# Altium PCB PocketBeagle.PcbDoc (part 2 of 2)
Units mm, origin at the board's own origin, x right, y up, seen from the top; angles counter-clockwise.
Board outline 55 x 35 mm, 4 copper layers (Top, VDD, DigitalGND, Bottom), stack 2.11 mm thick; 63 components, 132 nets, 486 pads, 168 vias.
Unrouted connection lines stored in the file: 3.
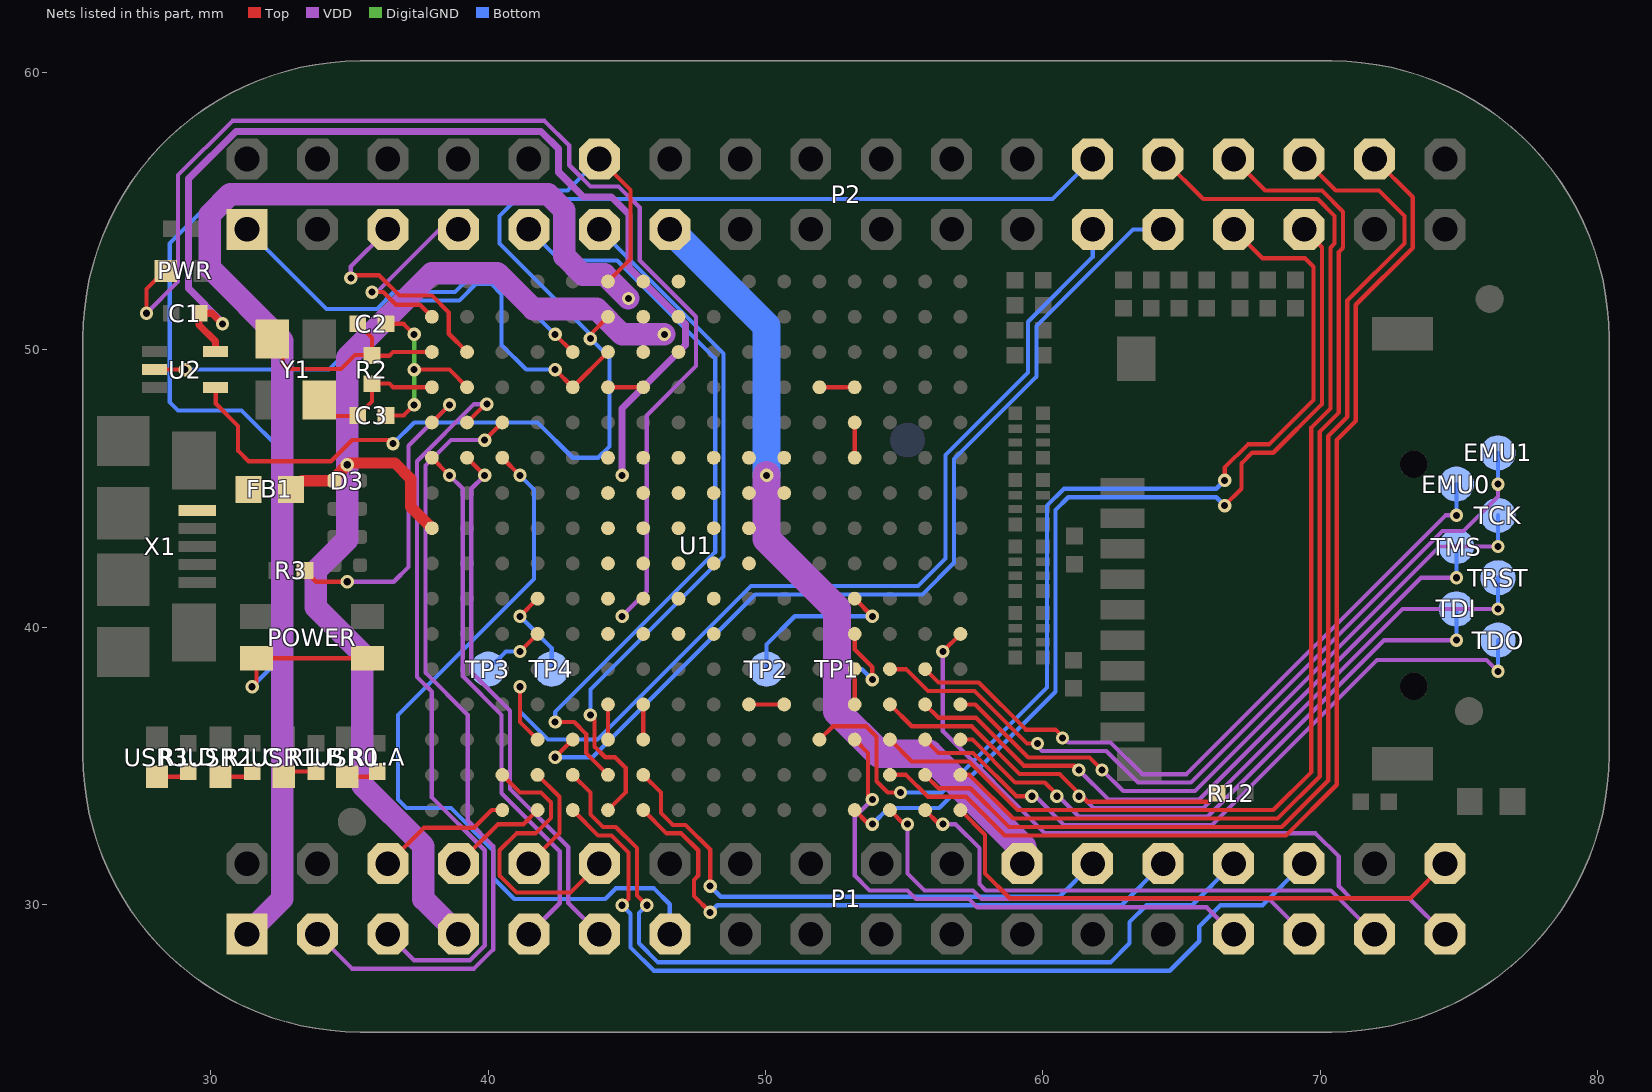
[diagram p4: the nets of this part, all layers, seen from the top]

## Via types
v1: diameter 0.48, hole 0.254, Top to Bottom, tented both sides, 168 vias

## Nets (pads, with @x,y where several pads share a name; then routed paths per layer and width w, separated by ;. In a path a pad name is that pad's centre, name@x,y a point inside that pad or via, vN(x,y) a via of type N, cw(c..) or ccw(c..) an arc to the next point about the centre after c; other vN are vias at no path point) (continued)
I2C1.SCL: P2.9 U1.B11 | length 27.2
  Top w0.152: v1(42.418,36.576) 43.104,36.576 43.536,36.144 43.536,35.458 U1.B11@44.323,34.671
  Bottom w0.152: P2.9@41.47,54.33 42.587,53.213 44.653,53.213 48.184,49.682 48.184,42.697 42.418,36.932 v1(42.418,36.576)
I2C1.SDA: P2.11 U1.A11 | length 25.8
  Top w0.152: v1(43.688,36.83) 43.84,36.678 43.84,35.687 44.221,35.306 44.577,35.306 44.958,34.925 44.958,34.036 U1.A11@44.323,33.401
  Bottom w0.152: v1(43.688,36.83) 43.688,37.744 48.489,42.545 48.489,49.851 P2.11@44.01,54.33
I2C2.SCL: P1.28 U1.A10 | length 22.2
  Top w0.152: U1.A10@45.593,33.401 46.431,32.563 46.965,32.563 47.574,31.953 47.574,31.039 47.422,30.886 47.422,30.302 v1(48.006,29.718)
  Bottom w0.152: v1(48.006,29.718) 48.26,29.972 62.832,29.972 P1.28@64.33,31.47
I2C2.SDA: P1.26 U1.B10 | length 19.7
  Top w0.152: U1.B10@45.593,34.671 46.228,34.036 46.228,33.299 46.66,32.868 47.117,32.868 48.006,31.979 v1(48.006,30.658)
  Bottom w0.152: v1(48.006,30.658) 48.387,30.277 60.597,30.277 P1.26@61.79,31.47
JTAG_EMU0: EMU0.TP U1.E2 | length 25.7
  Top w0.152: U1.E2@55.753,38.481 56.236,37.998 57.683,37.998 59.382,36.3 60.449,36.3 60.7,36.049 v1(60.7,36)
  VDD w0.152: v1(60.7,36) 60.749,36 60.909,35.839 62.433,35.839 63.576,34.696 65.176,34.696 74.505,44.025 v1(74.9,44.025)
  Bottom w0.152: v1(74.9,44.025) EMU0.TP@74.9,45.15
JTAG_EMU1: EMU1.TP U1.E3 | length 29.5
  Top w0.152: U1.E3@54.483,38.481 55.067,38.481 55.855,37.694 57.531,37.694 59.425,35.8 v1(59.8,35.8)
  VDD w0.152: v1(59.8,35.8) 59.8,35.7 59.965,35.535 62.281,35.535 63.424,34.392 65.329,34.392 74.397,43.459 75.159,43.459 76.4,44.701 v1(76.4,45.15)
  Bottom w0.152: v1(76.4,45.15) EMU1.TP@76.4,46.275
JTAG_TCK: TCK.TP U1.D1 | length 25.4
  Top w0.152: U1.D1@57.023,37.211 57.556,37.211 59.467,35.3 61.677,35.3 v1(62.128,34.849)
  VDD w0.152: v1(62.128,34.849) 62.89,34.087 65.481,34.087 74.294,42.9 v1(76.4,42.9)
  Bottom w0.152: v1(76.4,42.9) TCK.TP@76.4,44.025
JTAG_TDI: TDI.TP U1.C1 | length 22.8
  Top w0.152: U1.C1@57.023,35.941 57.455,35.941 58.996,34.4 60.063,34.4 60.5,33.963 v1(60.5,33.9)
  VDD w0.152: v1(60.5,33.9) 60.563,33.9 61.29,33.172 65.938,33.172 72.291,39.525 v1(74.9,39.525)
  Bottom w0.152: v1(74.9,39.525) TDI.TP@74.9,40.65
JTAG_TDO: TDO.TP U1.C2 | length 25.7
  Top w0.152: U1.C2@55.753,35.941 56.236,35.458 57.48,35.458 59.039,33.9 v1(59.6,33.9)
  VDD w0.152: v1(59.6,33.9) 59.724,33.9 60.757,32.868 66.091,32.868 72.034,38.811 75.989,38.811 v1(76.4,38.4)
  Bottom w0.152: v1(76.4,38.4) TDO.TP@76.4,39.525
JTAG_TMS: TMS.TP U1.D2 | length 25
  Top w0.152: U1.D2@55.753,37.211 56.236,36.728 57.582,36.728 59.31,35 61.139,35 v1(61.29,34.849)
  VDD w0.152: v1(61.29,34.849) 62.357,33.782 65.634,33.782 73.627,41.775 v1(74.9,41.775)
  Bottom w0.152: v1(74.9,41.775) TMS.TP@74.9,42.9
JTAG_TRST#: R12.2 TRST.TP U1.D3 | length 32.8
  Top w0.152: U1.D3@54.483,37.211 55.27,36.424 57.429,36.424 59.153,34.7 60.601,34.7 61.3,34.001 v1(61.3,33.9) 61.401,33.9 61.595,33.706 65.972,33.706 R12.2@66.277,34.011
  VDD w0.152: v1(61.3,33.9) 61.401,33.9 61.824,33.477 65.786,33.477 72.959,40.65 v1(76.4,40.65)
  Bottom w0.152: v1(76.4,40.65) TRST.TP@76.4,41.775
NetR1.A_1: R1.A.1 USR0.1 | length 1.2
  Top w0.152: USR0.1@34.925,34.606 36.006,34.606 R1.A.1@36.1,34.7
NetR1.B_1: R1.B.1 USR1.1 | length 1.1
  Top w0.152: USR1.1@32.7,34.7 32.792,34.792 R1.B.1@33.8,34.792
NetR1.C_1: R1.C.1 USR2.1 | length 1.1
  Top w0.152: USR2.1@30.353,34.606 31.306,34.606 R1.C.1@31.4,34.7
NetR1.D_1: R1.D.1 USR3.1 | length 1.1
  Top w0.152: USR3.1@28.067,34.606 28.906,34.606 R1.D.1@29.1,34.8
NetR3_2: R3.2 U1.M16 | length 11.5
  Top w0.152: R3.2@33.393,42.037 33.8,41.631 v1(34.925,41.631) ; U1.M16@37.973,47.371 v1(38.608,48.006)
  VDD w0.152: v1(34.925,41.631) 36.601,41.631 37.135,42.164 37.135,46.533 v1(38.608,48.006)
NetTP1_TP: TP1.TP U1.F4 | length 3.3
  Top w0.152: U1.F4@53.213,39.751 53.213,39.192 53.848,38.557 v1(53.848,38.1)
  Bottom w0.152: TP1.TP@52.578,38.481 53.467,38.481 v1(53.848,38.1)
NetTP2_TP: TP2.TP U1.G4 | length 6
  Top w0.152: U1.G4@53.213,41.021 v1(53.848,40.386)
  Bottom w0.152: TP2.TP@50.038,38.481 50.038,39.37 51.054,40.386 v1(53.848,40.386)
NetTP3_TP: TP3.TP U1.F13 | length 2.3
  Top w0.152: v1(41.148,39.116) U1.F13@41.783,39.751
  Bottom w0.152: TP3.TP@40.005,38.481 40.64,39.116 v1(41.148,39.116)
NetTP4_TP: TP4.TP U1.G13 | length 3.3
  Top w0.152: v1(41.148,40.386) U1.G13@41.783,41.021
  Bottom w0.152: v1(41.148,40.386) 42.291,39.243 TP4.TP@42.291,38.481
NetU1_C10: U1.C10 U1.D10 | length 1.3
  Top w0.152: U1.C10@45.593,35.941 U1.D10@45.593,37.211
NetU1_C11: U1.C11 U1.D11 | length 1.3
  Top w0.152: U1.C11@44.323,35.941 U1.D11@44.323,37.211
NetU1_D4: U1.D4 U1.E4 | length 1.3
  Top w0.152: U1.D4@53.213,37.211 U1.E4@53.213,38.481
NetU1_D6: U1.D6 U1.D7 | length 1.3
  Top w0.152: U1.D7@49.403,37.211 U1.D6@50.673,37.211
NetU1_L4: U1.L4 U1.M4 | length 1.3
  Top w0.152: U1.L4@53.213,46.101 U1.M4@53.213,47.371
NetU1_N4: U1.N4 U1.N5 | length 1.3
  Top w0.152: U1.N5@51.943,48.641 U1.N4@53.213,48.641
NetU1_N10: U1.N10 U1.N11 | length 1.3
  Top w0.152: U1.N11@44.323,48.641 U1.N10@45.593,48.641
OSC.GND: C2.1 C3.1 U1.N15 | length 7.1
  Top w0.152: C3.1@36.314,47.625 36.957,47.625 v1(37.338,48.006) ; C2.1@36.314,50.927 36.957,50.927 v1(37.338,50.546) ; v1(37.338,49.276) 38.608,49.276 U1.N15@39.243,48.641
  DigitalGND w0.152: v1(37.338,48.006) v1(37.338,49.276) v1(37.338,50.546)
OSC.IN: C2.2 R2.2 U1.P16 Y1.1 | length 7.7
  Top w0.152: Y1.1@32.6,50 32.6,49.5 32.8,49.3 34.7,49.3 35.2,49.8 35.8,49.8 R2.2@35.814,49.786 ; C2.2@35.31,50.923 35.314,50.927 35.814,50.427 R2.2@35.814,49.786 ; R2.2@35.9,49.7 R2.2@35.824,49.776 ; U1.P16@37.973,49.911 36.576,49.911 36.441,49.776 R2.2@35.824,49.776 ; R2.2@35.814,49.786 R2.2@35.824,49.776 ; R2.2@35.814,49.786 R2.2@35.814,49.784 35.814,49.776 R2.2@35.824,49.776
OSC.OUT: C3.2 R2.1 U1.N16 Y1.3 | length 4.9
  Top w0.152: Y1.3@34,47.6 35.289,47.6 35.31,47.621 35.314,47.625 35.814,48.125 R2.1@35.814,48.768 35.814,48.776 36.441,48.776 36.576,48.641 U1.N16@37.973,48.641
PMIC_PGOOD: U1.N12 U1.P11 U2.2 | length 20.8
  Top w0.152: U2.2@27.983,49.276 v1(29.083,49.276) ; v1(42.418,49.276) U1.N12@43.053,48.641 U1.P11@44.323,49.911
  Bottom w0.152: v1(29.083,49.276) 34.265,49.276 36.754,51.765 38.964,51.765 39.573,52.375 40.107,52.375 40.488,51.994 40.488,50.165 41.377,49.276 v1(42.418,49.276)
PRU0.1: P1.33 U1.A2 | length 18.8
  Top w0.152: U1.A2@55.753,33.401 56.261,32.893 v1(56.388,32.893)
  VDD w0.152: v1(56.388,32.893) 56.845,32.893 57.709,32.029 57.709,30.734 57.937,30.505 70.375,30.505 P1.33@71.95,28.93
PRU0.2: P2.32 U1.B2 | length 42
  Top w0.152: U1.B2@55.753,34.671 56.236,34.188 57.379,34.188 58.776,32.791 68.605,32.791 70.282,34.468 70.282,46.888 70.968,47.574 70.968,51.765 73.025,53.823 73.025,54.813 72.111,55.728 70.552,55.728 P2.32@69.41,56.87
PRU0.3: P2.30 U1.B1 | length 39.7
  Top w0.152: U1.B1@57.023,34.671 57.353,34.671 58.928,33.096 68.453,33.096 69.977,34.62 69.977,47.041 70.663,47.727 70.663,53.518 70.815,53.67 70.815,54.966 70.053,55.728 68.012,55.728 P2.30@66.87,56.87
PRU0.4: P1.31 U1.A3 | length 17.8
  Top w0.152: U1.A3@54.483,33.401 54.991,32.893 v1(55.118,32.893)
  VDD w0.152: v1(55.118,32.893) 55.118,31.115 55.728,30.505 57.48,30.505 57.785,30.201 68.139,30.201 P1.31@69.41,28.93
PRU0.5: P2.34 U1.B3 | length 42
  Top w0.152: U1.B3@54.483,34.671 55.067,34.671 55.855,33.884 57.226,33.884 58.623,32.487 68.758,32.487 70.587,34.315 70.587,46.736 71.272,47.422 71.272,51.613 73.33,53.67 73.33,55.49 P2.34@71.95,56.87
PRU0.6: P2.28 U1.C3 | length 44.2
  Top w0.152: U1.C3@54.483,35.941 55.27,35.154 57.328,35.154 59.08,33.401 68.301,33.401 69.672,34.773 69.672,47.193 70.358,47.879 70.358,53.67 70.51,53.823 70.51,54.813 69.901,55.423 65.777,55.423 P2.28@64.33,56.87
PRU0.7: P1.29 U1.C4 | length 20
  Top w0.152: U1.C4@53.213,35.941 53.696,35.458 53.696,33.934 v1(53.848,33.782)
  VDD w0.152: v1(53.848,33.782) 53.213,33.147 53.213,31.039 53.746,30.505 55.118,30.505 55.423,30.201 57.328,30.201 57.633,29.896 65.904,29.896 P1.29@66.87,28.93
PRU1.10: P1.35 U1.F1 | length 25.5
  Top w0.152: v1(56.388,39.116) U1.F1@57.023,39.751
  VDD w0.152: v1(56.388,39.116) 56.388,36.246 60.071,32.563 69.825,32.563 70.663,31.725 70.663,30.658 71.12,30.201 73.219,30.201 P1.35@74.49,28.93
PWM0A: P1.36 U1.A1 | length 20.1
  Top w0.152: U1.A1@57.023,33.401 57.912,32.512 57.912,31.115 58.801,30.226 73.246,30.226 P1.36@74.49,31.47
PWM1A: P2.1 U1.P12 | length 14.6
  Top w0.152: v1(42.418,50.546) U1.P12@43.053,49.911
  Bottom w0.152: P2.1@31.31,54.33 34.18,51.46 35.992,51.46 36.601,52.07 38.811,52.07 39.421,52.68 40.284,52.68 v1(42.418,50.546)
PWR.BTN: P2.12 POWER.3 POWER.4 U1.T11 | length 46.6
  Top w0.152: v1(31.496,37.846) 31.655,38.005 POWER.3@31.655,38.874 POWER.4@35.655,38.874 ; P2.12@44.01,56.87 45.136,55.744 45.136,53.264 U1.T11@44.323,52.451
  Bottom w0.152: v1(31.496,37.846) 32.639,38.989 32.639,46.279 31.115,47.803 28.829,47.803 28.524,48.108 28.524,53.823 30.429,55.728 42.868,55.728 P2.12@44.01,56.87
RESET#: P2.26 U1.R11 U2.4 | length 50.8
  Top w0.152: U2.4@30.183,48.626 30.183,48.049 30.988,47.244 30.988,46.355 31.369,45.974 34.341,45.974 35.103,46.736 36.449,46.736 v1(36.576,46.609) ; v1(43.688,50.394) 43.688,50.546 U1.R11@44.323,51.181
  Bottom w0.152: v1(36.576,46.609) 37.338,47.371 41.783,47.371 43.053,46.101 43.967,46.101 44.374,46.507 44.374,49.708 v1(43.688,50.394) 43.688,50.546 40.411,53.823 40.411,54.813 41.021,55.423 60.343,55.423 P2.26@61.79,56.87
SPI0.CLK: P1.8 U1.A13 | length 3.7
  Top w0.152: P1.8@38.93,31.47 40.353,32.893 41.275,32.893 U1.A13@41.783,33.401
SPI0.CS: P1.6 U1.A14 | length 4.9
  Top w0.152: P1.6@36.39,31.47 37.686,32.766 39.497,32.766 40.132,33.401 U1.A14@40.513,33.401
SPI0.MISO: P1.10 U1.B13 | length 4
  Top w0.152: P1.10@41.47,31.47 42.57,32.57 42.57,33.884 U1.B13@41.783,34.671
SPI0.MOSI: P1.12 U1.B14 | length 10.3
  Top w0.152: U1.B14@40.513,34.671 41.148,34.036 41.91,34.036 42.266,33.68 42.266,33.122 41.707,32.563 41.021,32.563 40.411,31.953 40.411,31.039 41.021,30.429 42.969,30.429 P1.12@44.01,31.47
SPI1.CLK: P2.29 U1.C5 | length 38.1
  Top w0.152: U1.C5@51.943,35.941 52.426,36.424 53.619,36.424 54,36.043 54,34.442 54.407,34.036 v1(54.864,34.036) ; v1(66.548,45.288) 66.548,45.745 67.386,46.584 68.148,46.584 69.748,48.184 69.748,52.984 69.444,53.289 67.911,53.289 P2.29@66.87,54.33
  Bottom w0.152: v1(54.864,34.036) 56.363,34.036 60.147,37.821 60.147,44.374 60.757,44.983 66.243,44.983 v1(66.548,45.288)
SPI1.CS: P2.31 U1.A4 | length 34.5
  Top w0.152: U1.A4@53.213,33.401 53.721,32.893 v1(53.848,32.893) ; v1(66.548,44.374) 67.158,44.983 67.158,45.898 67.539,46.279 68.301,46.279 70.053,48.031 70.053,53.687 P2.31@69.41,54.33
  Bottom w0.152: v1(53.848,32.893) 54.432,33.477 56.261,33.477 60.452,37.668 60.452,44.221 60.909,44.679 66.243,44.679 v1(66.548,44.374)
SPI1.MISO: P2.27 U1.C12 | length 33.9
  Top w0.152: v1(42.418,35.306) U1.C12@43.053,35.941
  Bottom w0.152: v1(42.418,35.306) 43.764,35.306 49.632,41.173 55.651,41.173 56.794,42.316 56.794,46.05 59.766,49.022 59.766,50.851 63.245,54.33 P2.27@64.33,54.33
SPI1.MOSI: P2.25 U1.C13 | length 35.6
  Top w0.152: v1(41.148,37.846) 41.148,36.576 U1.C13@41.783,35.941
  Bottom w0.152: v1(41.148,37.846) 41.148,36.957 42.164,35.941 43.942,35.941 49.479,41.478 55.499,41.478 56.49,42.469 56.49,46.203 59.461,49.174 59.461,51.003 61.79,53.332 P2.25@61.79,54.33
UART0.RX: P1.32 U1.A12 | length 32.8
  Top w0.152: U1.A12@43.053,33.401 43.967,32.487 44.45,32.487 45.06,31.877 45.06,30.201 v1(44.831,29.972)
  Bottom w0.152: v1(44.831,29.972) 45.136,29.667 45.136,28.448 45.974,27.61 64.567,27.61 65.634,28.677 65.634,29.21 66.396,29.972 67.912,29.972 P1.32@69.41,31.47
UART0.TX: P1.30 U1.B12 | length 31.2
  Top w0.152: U1.B12@43.053,34.671 43.688,34.036 43.688,33.249 44.145,32.791 44.602,32.791 45.364,32.029 45.364,30.328 v1(45.72,29.972)
  Bottom w0.152: v1(45.72,29.972) 45.441,29.693 45.441,28.6 46.126,27.915 62.433,27.915 63.119,28.6 63.119,29.362 63.729,29.972 65.372,29.972 P1.30@66.87,31.47
UART4.RX: P2.5 U1.P15 | length 8.1
  Top w0.152: v1(35.052,52.578) 35.154,52.68 36.068,52.68 36.805,51.943 37.973,51.943 38.583,51.333 38.583,50.571 U1.P15@39.243,49.911
  VDD w0.152: v1(35.052,52.578) 35.052,52.992 P2.5@36.39,54.33
UART4.TX: P2.7 U1.R16 | length 6.6
  Top w0.152: v1(35.814,52.07) 36.22,52.07 36.678,51.613 37.541,51.613 U1.R16@37.973,51.181
  VDD w0.152: v1(35.814,52.07) 35.992,52.07 38.252,54.33 P2.7@38.93,54.33
USB1.D+: P1.11 U1.L15 | length 19.5
  Top w0.152: U1.L15@39.243,46.101 v1(39.878,45.466)
  VDD w0.152: v1(39.878,45.466) 39.395,44.983 39.395,38.379 40.792,36.982 40.792,34.163 42.888,32.067 42.888,30.052 P1.11@44.01,28.93
USB1.D-: P1.9 U1.L16 | length 19.5
  Top w0.152: U1.L16@37.973,46.101 v1(38.608,45.466)
  VDD w0.152: v1(38.608,45.466) 39.091,44.983 39.091,38.227 40.488,36.83 40.488,34.011 42.583,31.915 42.583,30.043 P1.9@41.47,28.93
USB1.DRVVBUS: P1.3 U1.M14 | length 29
  Top w0.152: v1(39.878,46.736) U1.M14@40.513,47.371
  VDD w0.152: P1.3@33.85,28.93 35.094,27.686 39.497,27.686 40.183,28.372 40.183,32.106 39.268,33.02 39.268,36.83 37.744,38.354 37.744,45.822 38.659,46.736 v1(39.878,46.736)
USB1.ID: P1.13 U1.L14 | length 28.2
  Top w0.152: U1.L14@40.513,46.101 v1(41.148,45.466)
  Bottom w0.152: v1(41.148,45.466) 41.656,44.958 41.656,41.732 36.754,36.83 36.754,33.782 37.059,33.477 38.659,33.477 40.183,31.953 40.183,30.963 40.945,30.201 44.221,30.201 44.602,30.582 45.974,30.582 46.55,30.006 P1.13@46.55,28.93
USB1.VBUS: P1.5 U1.M15 | length 26.9
  Top w0.152: U1.M15@39.243,47.371 39.903,48.031 v1(39.954,48.031)
  VDD w0.152: P1.5@36.39,28.93 37.329,27.991 39.345,27.991 39.878,28.524 39.878,31.953 37.973,33.858 37.973,37.668 37.44,38.202 37.44,45.974 39.497,48.031 v1(39.954,48.031)
VBUS.RAW: FB1.1 X1.VBUS
VDD_1V8: U1.F10 U1.G10 U1.H10 U1.H11 U1.J10 U1.J11 U1.K10 U1.L10
VDD_3V3A: U1.F8 U1.F9 U1.G8 U1.G9 U1.H7 U1.H8 U1.H9 U1.J7 U1.J8 U1.J9 U1.K8 U1.K9 U1.L8 U1.L9
VDD_3V3AUX: PWR.2 U1.F11 U1.G11 | length 43.1
  Top w0.152: v1(27.686,51.308) 27.686,52.185 PWR.2@28.333,52.832
  VDD w0.152: v1(27.686,51.308) 28.829,52.451 28.829,56.286 30.785,58.242 42.037,58.242 42.926,57.353 42.926,56.642 43.688,55.88 44.704,55.88 45.466,55.118 45.466,53.213 47.498,51.181 47.498,49.403 45.72,47.625 45.72,41.275 v1(44.831,40.386)
VDD_RTC: C1.1 U1.K11 U1.L11 U2.5 | length 38.1
  Top w0.254: U2.5@29.906,49.926 U2.5@30.183,49.926 30.183,50.284 29.583,50.884 29.583,51.308 30.048,51.308 v1(30.429,50.927)
  VDD w0.254: v1(30.429,50.927) 30.429,50.978 29.21,52.197 29.21,56.159 30.912,57.861 41.91,57.861 42.545,57.226 42.545,56.388 43.434,55.499 44.45,55.499 45.085,54.864 45.085,52.959 47.117,50.927 47.117,50.165 44.831,47.879 v1(44.831,45.466)
VIN: P1.1 U1.P10 U1.R10 U1.T10 | length 45.5
  VDD w0.813: P1.1@31.31,28.93 32.588,30.208 32.588,50.317 29.972,52.934 29.972,54.864 30.709,55.601 42.164,55.601 42.748,55.016 42.748,53.365 43.409,52.705 44.196,52.705 v1(45.06,51.841)
VIN.USB: D3.2 FB1.2 P1.7 U1.J16 U1.P9 U1.R9 U1.T9 | length 44
  Top w0.406: FB1.2@32.981,44.958 33.298,45.276 D3.2@34.462,45.276 34.462,45.384 v1(34.925,45.847) 34.989,45.91 36.639,45.91 37.211,45.339 37.211,44.323 U1.J16@37.973,43.561
  VDD w0.813: P1.7@38.93,28.93 37.668,30.192 37.668,32.106 35.458,34.315 35.458,39.04 33.782,40.716 33.782,42.012 34.925,43.155 34.925,44.831 v1(34.925,45.847) 34.925,49.708 37.973,52.756 40.335,52.756 41.631,51.46 43.917,51.46 44.831,50.546 v1(46.355,50.546)
VOUT: P1.24 P2.13 U1.K6 U1.K7 U1.L6 U1.L7 | length 29.2
  VDD w1.016: v1(50.038,45.466) 50.038,43.18 52.578,40.64 52.578,36.957 54.102,35.433 55.88,35.433 59.25,32.063 P1.24@59.25,31.47
  Bottom w1.016: P2.13@46.55,54.33 50.038,50.842 v1(50.038,45.466)
pads on no net: C1.2 FUD1.P$1 FUD2.P$1 FUD3.P$1 PWR.1 R1.2 U1.A5 U1.A6 U1.B5 U1.D5 U1.D12 U1.D13 U1.D14 U1.D15 U1.D16 U1.E13 U1.E14 U1.E15 U1.E16 U1.F14 U1.F15 U1.F16 U1.G14 U1.G15 U1.G16 U1.H6 U1.H14 U1.H15 U1.H16 U1.J6 U1.J14 U1.J15 U1.K4 U1.K13 U1.L13 U1.M1 U1.M13 U1.N1 U1.N2 U1.P1 U1.P2 U1.P3 U1.P4 U1.R1 U1.R2 U1.R3 U1.R4 U1.R12 U1.T1 U1.T2 U1.T3 U1.T4 U1.T12 U1.T13 U2.1 X2.1@73.364,37.866 X2.1@73.364,45.866 Y1.2 Y1.4
copper on no net: | length 1.6
  Top w0.152: 29.583,54.356 29.583,53.729 29.833,53.479 29.833,52.832
  other v1: 29.896,32.944

## Polygon pours and split planes (outlines as drawn)
3.3V on Top "Polygon_3_Net_3.3V" (solid, remove dead copper, shelved, pour order 6): 60.933,36.246 61.724,36.246 62.027,36.549 62.027,40.968 62.105,41.046 63.17,41.046 63.17,42.367 60.704,42.367 60.323,41.986 59.79,41.986 59.563,41.759 59.563,40.283 59.714,40.132 60.323,40.132 60.477,39.978 60.477,36.701
GND on Top "Polygon_3_Net_GND" (solid, remove dead copper, shelved, pour order 9): 59.714,42.189 60.35,42.189 60.35,42.951 61.951,42.951 61.951,45.54 62.713,46.302 62.713,48.16 61.952,48.92 61.085,48.92 60.628,48.463 59.637,48.463 59.487,48.313 59.487,42.416
CGND on Top "Polygon_2_Net_CGND" (solid, remove dead copper, shelved, pour order 20): 24.273,43.027 24.273,24.273 81.527,24.273 81.527,43.027 71.88,43.027 70.764,41.912 70.764,34.265 75.946,34.265 75.946,32.234 74.955,31.244 74.955,28.194 43.741,28.194 43.358,28.577 43.358,29.415 42.14,30.632 36.121,30.632 35.662,31.091 35.662,32.006 34.063,33.604 30.787,33.604 30.175,34.216 30.175,40.843 28.577,40.843 28.277,41.143 28.277,43.027
CGND on Top "Polygon_1_Net_CGND" (solid, remove dead copper, shelved, pour order 19): 24.273,42.773 24.273,61.527 81.527,61.527 81.527,42.773 71.831,42.773 71.831,51.361 72.82,52.349 73.734,52.349 75.336,53.951 75.336,57.199 74.877,57.658 30.939,57.658 30.404,57.123 30.404,45.542 29.415,45.542 28.277,44.404 28.277,42.773
GND on Top "Polygon_4_Net_GND" (solid, remove dead copper, shelved, pour order 8): 28.372,41.859 28.372,41.294 28.645,41.021 30.321,41.021 30.505,40.837 30.505,39.999 30.931,39.573 36.701,39.573 37.16,39.889 37.16,40.9 36.735,41.326 33.28,41.326 33.02,41.586 33.02,42.272 32.747,42.545 31.007,42.545 30.321,41.859
VBUS.RAW on Top "Polygon_1_Net_VBUS.RAW" (solid, remove dead copper, shelved, pour order 2): 29.337,44.45 30.3,44.45 30.353,44.503 30.353,45.138 30.554,45.339 31.623,45.339 31.623,43.889 31.422,43.688 30.427,43.688 30.173,43.942 29.337,43.942
GND on Top "Polygon_2_Net_GND" (solid, remove dead copper, shelved, pour order 18): 42.799,44.376 42.799,47.625 46.048,47.625 46.609,48.186 46.609,48.895 48.387,48.895 48.387,48.186 48.948,47.625 52.197,47.625 52.197,44.376 52.758,43.815 53.467,43.815 53.467,42.037 52.758,42.037 52.197,41.476 52.197,38.227 48.948,38.227 48.387,37.666 48.387,36.957 46.609,36.957 46.609,37.666 46.048,38.227 42.799,38.227 42.799,41.476 42.238,42.037 41.529,42.037 41.529,43.815 42.238,43.815
BAT.VIN on Top "Polygon_1_Net_BAT.VIN" (solid, remove dead copper, shelved, pour order 16): 48.387,49.657 48.387,53.139 48.006,53.52 48.006,57.33 47.043,58.293 46.048,58.293 45.212,57.457 45.212,56.208 45.921,55.499 46.937,55.499 47.498,54.938 47.498,52.631 47.244,52.377 47.244,49.985 47.572,49.657
VIN on Top "Polygon_1_Net_VIN" (solid, remove dead copper, shelved, pour order 15): 45.847,52.705 45.032,52.705 44.704,52.377 44.704,49.985 45.032,49.657 45.847,49.657
VDD_RTC on Top "Polygon_1_Net_VDD_RTC" (solid, remove dead copper, shelved, pour order 14): 44.069,46.355 44.884,46.355 45.212,46.027 45.212,44.905 44.884,44.577 44.069,44.577
VDD_3V3AUX on Top "Polygon_1_Net_VDD_3V3AUX" (solid, remove dead copper, shelved, pour order 13): 44.069,41.275 44.884,41.275 45.212,40.947 45.212,39.825 44.884,39.497 44.069,39.497
VDD_3V3A on Top "Polygon_1_Net_VDD_3V3A" (solid, remove dead copper, shelved, pour order 7): 46.66,46.304 48.336,46.304 48.336,44.355 48.927,43.764 49.606,43.764 49.606,42.088 48.927,42.088 48.336,41.497 48.336,39.548 46.66,39.548
VDD_1V8 on Top "Polygon_1_Net_VDD_1V8" (solid, remove dead copper, shelved, pour order 5): 45.339,46.228 45.339,44.376 44.651,43.688 44.196,43.688 44.196,42.164 44.651,42.164 45.339,41.476 45.339,39.624 45.847,39.624 45.847,46.228
VIN.USB on Top "Polygon_2_Net_VIN.USB" (solid, remove dead copper, shelved, pour order 4): 47.117,52.705 46.302,52.705 45.974,52.377 45.974,49.985 46.302,49.657 47.117,49.657
3.3V on Top "Polygon_2_Net_3.3V" (solid, remove dead copper, shelved, pour order 1): 49.276,39.624 49.276,41.148 50.8,41.148 50.8,39.624
VOUT on Top "Polygon_1_Net_VOUT" (solid, remove dead copper, shelved, pour order 0): 49.276,46.228 50.8,46.228 50.8,44.704 49.276,44.704
VIN.USB on Top "Polygon_1_Net_VIN.USB" (solid, remove dead copper, shelved, pour order 3): 32.004,45.593 32.004,43.889 32.205,43.688 33.782,43.688 33.782,45.593
CGND on Bottom "Polygon_3_Net_CGND" (solid, remove dead copper, shelved, pour order 11): 25.023,42.773 25.023,60.777 80.777,60.777 80.777,42.773 60.706,42.773 60.706,50.827 63.371,53.492 65.176,53.492 72.21,53.492 72.746,54.028 72.746,57.199 72.287,57.658 32.537,57.658 32.537,42.773
CGND on Bottom "Polygon_4_Net_CGND" (solid, remove dead copper, shelved, pour order 10): 25.023,43.027 25.023,25.023 80.777,25.023 80.777,43.027 60.706,43.027 60.706,37.616 66.038,32.283 69.696,32.283 70.231,31.748 70.231,28.653 69.696,28.118 32.537,28.118 32.537,43.027
3.3V on VDD "Polygon_1_Net_3.3V" (solid, remove dead copper, shelved, pour order 12): 24.523,61.277 81.277,61.277 81.277,24.523 24.523,24.523
GND on DigitalGND "Polygon_1_Net_GND" (solid, remove dead copper, shelved, pour order 17): 24.773,61.027 81.027,61.027 81.027,24.773 24.773,24.773

## Keep-outs
Keep-Out Layer:
  the board outline again, w0

## Silkscreen, mask and mechanical layers (free items; w line width, h text height)
Dimension:
  the board outline again, w0
Top Assembly:
  circle w0.5: c58.166,32.258 r0.18
  lines w0.254: 27.686,33.909 28.448,33.909 ; 29.972,33.909 30.734,33.909 ; 30.48,52.451 30.48,53.213 ; 32.258,33.909 33.02,33.909 ; 34.544,33.909 35.306,33.909 ; 42.748,27.762 42.748,32.41 ; 42.748,53.518 42.748,58.166 ; 55.448,27.762 55.448,32.41 ; 55.448,53.518 55.448,58.166 ; 68.148,27.762 68.148,32.41 ; 68.148,53.518 68.148,58.166
  text "PocketBeagle Rev A2b" at 42.626,58.649 h1.97
  text "2" at 31.148,58.167 h1.26
  text "P2" at 34.26,58.166 h2.56
  text "36" at 75.819,56.579 h1.26
  text "35" at 75.819,54.039 h1.26
  text "1" at 31.159,52.579 h1.26
  text "OSD3358" at 58.928,32.852 h1.57
  text "2" at 31.148,32.576 h1.26
  text "36" at 75.819,31.179 h1.26
  text "35" at 75.819,28.639 h1.26
  text "1" at 31.286,27.179 h1.26
  text "beagleboard.org/pocket" at 41.539,26.238 h1.97
  text "P1" at 34.125,26.22 h2.56
Bottom Assembly:
  lines w0.254: 27.508,29.312 27.508,34.519 30.048,34.519 ; 27.508,56.49 27.508,51.283 30.048,51.283 ; 32.588,25.908 32.588,30.201 ; 32.588,57.633 32.588,55.601 ; 45.288,60.3 45.288,55.601 ; 50.368,25.527 50.368,30.201 ; 50.368,60.3 50.368,55.601 ; 60.528,60.3 60.528,55.601 ; 63.068,60.3 63.068,55.601 ; 65.608,25.527 65.608,30.201 ; 73.228,25.908 73.228,30.201 ; 73.228,59.792 73.228,55.601 ; 78.308,29.312 78.308,34.519 75.768,34.519 ; 78.308,56.49 78.308,51.283 75.768,51.283 ; 30.048,34.519 30.048,37.567 32.588,37.567 ; 30.048,34.519 30.048,30.201 32.588,30.201 ; 30.048,51.283 30.048,48.235 32.588,48.235 ; 30.048,51.283 30.048,55.601 32.588,55.601 ; 32.588,30.201 32.588,37.567 ; 32.588,30.201 35.128,30.201 ; 32.588,37.567 35.128,37.567 ; 32.588,48.235 32.588,55.601 ; 32.588,48.235 35.128,48.235 ; 32.588,55.601 35.128,55.601 ; 35.128,30.201 35.128,37.567 ; 35.128,30.201 45.288,30.201 ; 35.128,37.567 45.288,37.567 ; 35.128,48.235 40.208,48.235 ; 35.128,48.235 35.128,55.601 ; 35.128,55.601 40.208,55.601 ; 40.208,48.235 45.288,48.235 ; 40.208,48.235 40.208,55.601 ; 40.208,55.601 45.288,55.601 ; 45.288,30.201 45.288,37.567 ; 45.288,30.201 47.828,30.201 ; 45.288,37.567 47.828,37.567 ; 45.288,48.235 47.828,48.235 ; 45.288,48.235 45.288,55.601 ; 45.288,55.601 47.828,55.601 ; 47.828,30.201 47.828,37.567 ; 47.828,30.201 50.368,30.201 ; 47.828,37.567 50.368,37.567 ; 47.828,48.235 47.828,55.601 ; 47.828,48.235 50.368,48.235 ; 47.828,55.601 50.368,55.601 ; 50.368,30.201 50.368,37.567 ; 50.368,37.567 52.908,37.567 ; 50.368,48.235 52.908,48.235 ; 50.368,48.235 50.368,55.601 ; 50.368,55.601 52.908,55.601 ; 52.908,37.567 55.448,37.567 ; 52.908,37.567 52.908,30.201 55.448,30.201 ; 52.908,48.235 52.908,55.601 ; 52.908,48.235 55.448,48.235 ; 52.908,55.601 55.448,55.601 ; 55.448,30.201 55.448,37.567 ; 55.448,30.201 57.988,30.201 ; 55.448,37.567 57.988,37.567 ; 55.448,48.235 57.988,48.235 ; 55.448,48.235 55.448,55.601 ; 55.448,55.601 57.988,55.601 ; 57.988,30.201 57.988,37.567 ; 57.988,30.201 60.528,30.201 ; 57.988,37.567 60.528,37.567 ; 57.988,48.235 57.988,55.601 ; 57.988,48.235 60.528,48.235 ; 57.988,55.601 60.528,55.601 ; 60.528,30.201 60.528,37.567 ; 60.528,30.201 65.608,30.201 ; 60.528,37.567 65.608,37.567 ; 60.528,48.235 70.688,48.235 ; 60.528,48.235 60.528,55.601 ; 60.528,55.601 63.068,55.601 ; 63.068,55.601 70.688,55.601 ; 65.608,30.201 65.608,37.567 ; 65.608,30.201 70.688,30.201 ; 65.608,37.567 70.688,37.567 ; 70.688,30.201 70.688,37.567 ; 70.688,30.201 73.228,30.201 ; 70.688,37.567 73.228,37.567 ; 70.688,48.235 73.228,48.235 ; 70.688,48.235 70.688,55.601 ; 70.688,55.601 73.228,55.601 ; 73.228,30.201 73.228,37.567 ; 73.228,30.201 75.768,30.201 75.768,34.519 ; 73.228,37.567 75.768,37.567 75.768,34.519 ; 73.228,48.235 73.228,55.601 ; 73.228,48.235 75.768,48.235 75.768,51.283 ; 73.228,55.601 75.768,55.601 75.768,51.283
  text "RST" at 62.214,59.729 h0.69 r90
  text "PB" at 44.501,59.553 h1.97 r90
  text "46" at 57.201,59.471 h1.97 r90
  text "57" at 36.881,59.425 h1.97 r90
  text "52" at 41.961,59.431 h1.97 r90
  text "47" at 52.121,59.411 h1.97 r90
  text "44" at 59.741,59.413 h1.97 r90
  text "60" at 39.421,59.377 h1.97 r90
  text "64" at 54.661,59.361 h1.97 r90
  text "58" at 34.292,59.27 h1.77 r90
  text "BAT" at 49.007,59.118 h0.86
  text "PRU0" at 69.885,59.118 h0.86
  text "+" at 47.041,58.518 h1.97 r90
  text "T" at 49.581,58.518 h1.97 r90
  text "3" at 67.361,58.422 h1.97 r90
  text "2" at 69.901,58.413 h1.97 r90
  text "5" at 72.441,58.422 h1.97 r90
  text "6" at 64.821,58.378 h1.97 r90
  text "A7(1.8)" at 77.422,57.023 h1.57 r90
  text "59" at 29.261,56.388 h1.97 r90
  text "PWM1A" at 31.702,53.213 h1.57 r90
  text "23" at 34.341,53.213 h1.97 r90
  text "RX" at 36.881,53.213 h1.97 r90
  text "TX" at 39.421,53.213 h1.97 r90
  text "SCL" at 41.912,53.213 h1.77 r90
  text "SDA" at 44.452,53.213 h1.77 r90
  text "VOUT" at 47.041,53.213 h1.97 r90
  text "GND" at 49.581,53.213 h1.97 r90
  text "65" at 52.121,53.213 h1.97 r90
  text "27" at 54.661,53.213 h1.97 r90
  text "GND" at 57.201,53.213 h1.97 r90
  text "+3.3V" at 59.692,53.213 h1.77 r90
  text "MOSI" at 62.281,53.213 h1.97 r90
  text "MISO" at 64.821,53.213 h1.97 r90
  text "CLK" at 67.312,53.213 h1.77 r90
  text "CS1" at 69.901,53.213 h1.97 r90
  text "45" at 72.441,53.213 h1.97 r90
  text "A5/86" at 74.882,53.213 h1.57 r90
  text "P2" at 79.1,48.768 h2.56
  text "U4" at 38.415,48.641 h0.86
  text "I2C1" at 44.016,48.641 h0.86
  text "SPI1" at 69.67,48.641 h0.86
  text "+3.3V" at 46.992,36.941 h1.77 r90
  text "MISO" at 41.961,36.444 h1.97 r90
  text "PWM0A" at 74.882,36.411 h1.57 r90
  text "A6/87" at 31.702,36.36 h1.57 r90
  text "MOSI" at 44.501,36.335 h1.97 r90
  text "VOUT" at 59.848,36.179 h0.97 r90
  text "SPI0" at 39.27,36.131 h0.86
  text "I2C2" at 64.67,36.131 h0.86
  text "U0" at 68.959,36.131 h0.86
  text "P1" at 79.108,35.605 h2.56
  text "GND" at 57.375,35.522 h1.08 r90
  text "GND" at 49.581,35.327 h1.97 r90
  text "CS0" at 36.881,35.206 h1.97 r90
  text "SDA" at 62.388,35.208 h0.97 r90
  text "SCL" at 64.928,35.208 h0.97 r90
  text "CLK" at 39.372,35.057 h1.77 r90
  text "A+" at 52.295,34.443 h1.08 r90
  text "20" at 54.835,34.443 h1.08 r90
  text "TX" at 67.535,34.443 h1.08 r90
  text "RX" at 70.075,34.443 h1.08 r90
  text "26" at 72.615,34.443 h1.08 r90
  text "89" at 34.341,34.121 h1.97 r90
  text "P1.10" at 77.584,33.435 h1.97 r90
  text "VIN" at 29.324,32.367 h1.97 r90
  text "EN" at 34.292,27.813 h1.77 r90
  text "VB" at 36.881,27.813 h1.97 r90
  text "VI" at 39.421,27.813 h1.97 r90
  text "-" at 41.961,27.813 h1.97 r90
  text "+" at 44.501,27.813 h1.97 r90
  text "ID" at 47.041,27.813 h1.97 r90
  text "GND" at 49.403,27.813 h1.26 r90
  text "-" at 52.121,27.813 h1.97 r90
  text "0" at 54.661,27.813 h1.97 r90
  text "1" at 57.201,27.813 h1.97 r90
  text "2" at 59.741,27.813 h1.97 r90
  text "3" at 62.281,27.813 h1.97 r90
  text "4" at 64.821,27.813 h1.97 r90
  text "7" at 67.361,27.813 h1.97 r90
  text "4" at 69.901,27.813 h1.97 r90
  text "1" at 72.441,27.813 h1.97 r90
  text "USB1" at 44.532,25.654 h0.86
  text "AIN (1.8V)" at 61.693,25.654 h0.86
  text "PRU0" at 70.965,25.654 h0.86
Reference:
  text "75 Mils back-->" at 65.9,41.531 h0.39
  text "Try to move back 75 Mils <---" at 65.9,41.15 h0.39
UnusedBallReference:
  circle w0.152: c41.783,46.101 r0.508
  circle w0.152: c39.243,43.561 r0.508
  circle w0.152: c41.783,44.831 r0.508
  circle w0.152: c41.783,47.371 r0.508
  circle w0.152: c41.783,38.481 r0.508
  circle w0.152: c41.783,37.211 r0.508
  circle w0.152: c40.513,43.561 r0.508
  circle w0.152: c37.973,39.751 r0.508
  circle w0.152: c39.243,38.481 r0.508
  circle w0.152: c40.513,37.211 r0.524
  circle w0.152: c39.243,37.211 r0.508
  circle w0.152: c37.973,37.211 r0.508
  circle w0.152: c40.513,38.481 r0.508
  circle w0.152: c37.973,38.481 r0.508
  circle w0.152: c40.513,39.751 r0.508
  circle w0.152: c39.243,39.751 r0.508
  circle w0.152: c40.513,41.021 r0.524
  circle w0.152: c39.243,41.021 r0.508
  circle w0.152: c37.973,41.021 r0.508
  circle w0.152: c40.513,42.291 r0.508
  circle w0.152: c39.243,42.291 r0.508
  circle w0.152: c37.973,42.291 r0.508
  circle w0.152: c41.783,48.641 r0.508
  circle w0.152: c50.673,37.211 r0.508
  circle w0.152: c49.403,33.401 r0.508
  circle w0.152: c46.863,33.401 r0.508
  circle w0.152: c51.943,34.671 r0.508
  circle w0.152: c51.943,33.401 r0.508
  circle w0.152: c50.673,33.401 r0.508
  circle w0.152: c50.673,43.561 r0.508
  circle w0.152: c53.213,44.831 r0.508
  circle w0.152: c50.673,42.291 r0.508
  circle w0.152: c51.943,37.211 r0.508
  circle w0.152: c43.053,37.211 r0.508
UnusedArt:
  drawing of 1070 lines, arcs and shapes, not listed
UnmovablePinReference:
  region: 55.855,30.302 55.855,32.41 75.514,32.41 75.514,30.302
  region: 30.429,30.251 30.429,32.487 50.14,32.487 50.14,30.251
  region: 55.626,53.238 55.626,55.296 75.667,55.296 75.667,53.238
  region: 30.378,53.238 30.378,55.245 50.14,55.245 50.14,53.238
  region: 30.302,27.813 30.302,30.023 50.19,30.023 50.19,27.813
206bmp:
  lines w0.005: 70.025,39.775 37.009,46.043 37.009,39.775 70.025,46.043
ProcessorCenterReference:
  lines w0: 29.7,25.4 47.55,42.9 ; 29.7,25.4 29.7,42.9 ; 29.7,25.4 47.55,25.4 ; 29.7,42.9 65.4,42.9 ; 29.7,42.9 29.7,60.4 ; 29.7,60.4 47.55,42.9 ; 29.7,60.4 47.55,60.4 ; 47.55,25.4 47.55,42.9 ; 47.55,25.4 65.4,25.4 ; 47.55,42.9 47.55,60.4 ; 47.55,42.9 65.4,60.4 ; 47.55,42.9 65.4,25.4 ; 47.55,60.4 65.4,60.4 ; 65.4,25.4 65.4,42.9 ; 65.4,42.9 65.4,60.4
uSD-CenterReference:
  lines w0: 62.845,42.9 70.345,42.9 ; 62.845,42.9 62.845,50.4 ; 62.845,42.9 63.15,35.4 ; 62.845,50.4 70.345,42.9 ; 62.845,50.4 70.345,50.4 ; 63.15,35.4 70.345,35.4 ; 63.15,35.4 70.345,42.9 ; 70.345,35.4 70.345,42.9 ; 70.345,35.4 77.845,35.4 ; 70.345,42.9 70.345,50.4 ; 70.345,42.9 77.845,42.9 ; 70.345,42.9 77.845,35.4 ; 70.345,42.9 77.845,50.4 ; 70.345,50.4 77.845,50.4 ; 77.845,35.4 77.845,42.9 ; 77.845,42.9 77.845,50.4
PocketBeagleCenterReference:
  lines w0: 25.4,25.4 52.9,42.9 ; 25.4,25.4 25.4,42.9 ; 25.4,25.4 52.9,25.4 ; 25.4,42.9 52.9,42.9 ; 25.4,42.9 25.4,60.4 ; 25.4,60.4 52.9,42.9 ; 25.4,60.4 52.9,60.4 ; 52.9,25.4 52.9,42.9 ; 52.9,25.4 80.4,25.4 ; 52.9,42.9 80.4,42.9 ; 52.9,42.9 52.9,60.4 ; 52.9,42.9 80.4,25.4 ; 52.9,42.9 80.4,60.4 ; 52.9,60.4 80.4,60.4 ; 80.4,25.4 80.4,42.9 ; 80.4,42.9 80.4,60.4